# Altium PCB PCB1.PcbDoc
Units mil, origin at the board's own origin, x right, y up, seen from the top; angles counter-clockwise.
Board outline 2108.55 x 1574.8 mil, 2 copper layers (Top Layer, Bottom Layer); 9 components, 9 nets, 28 pads, 0 vias.
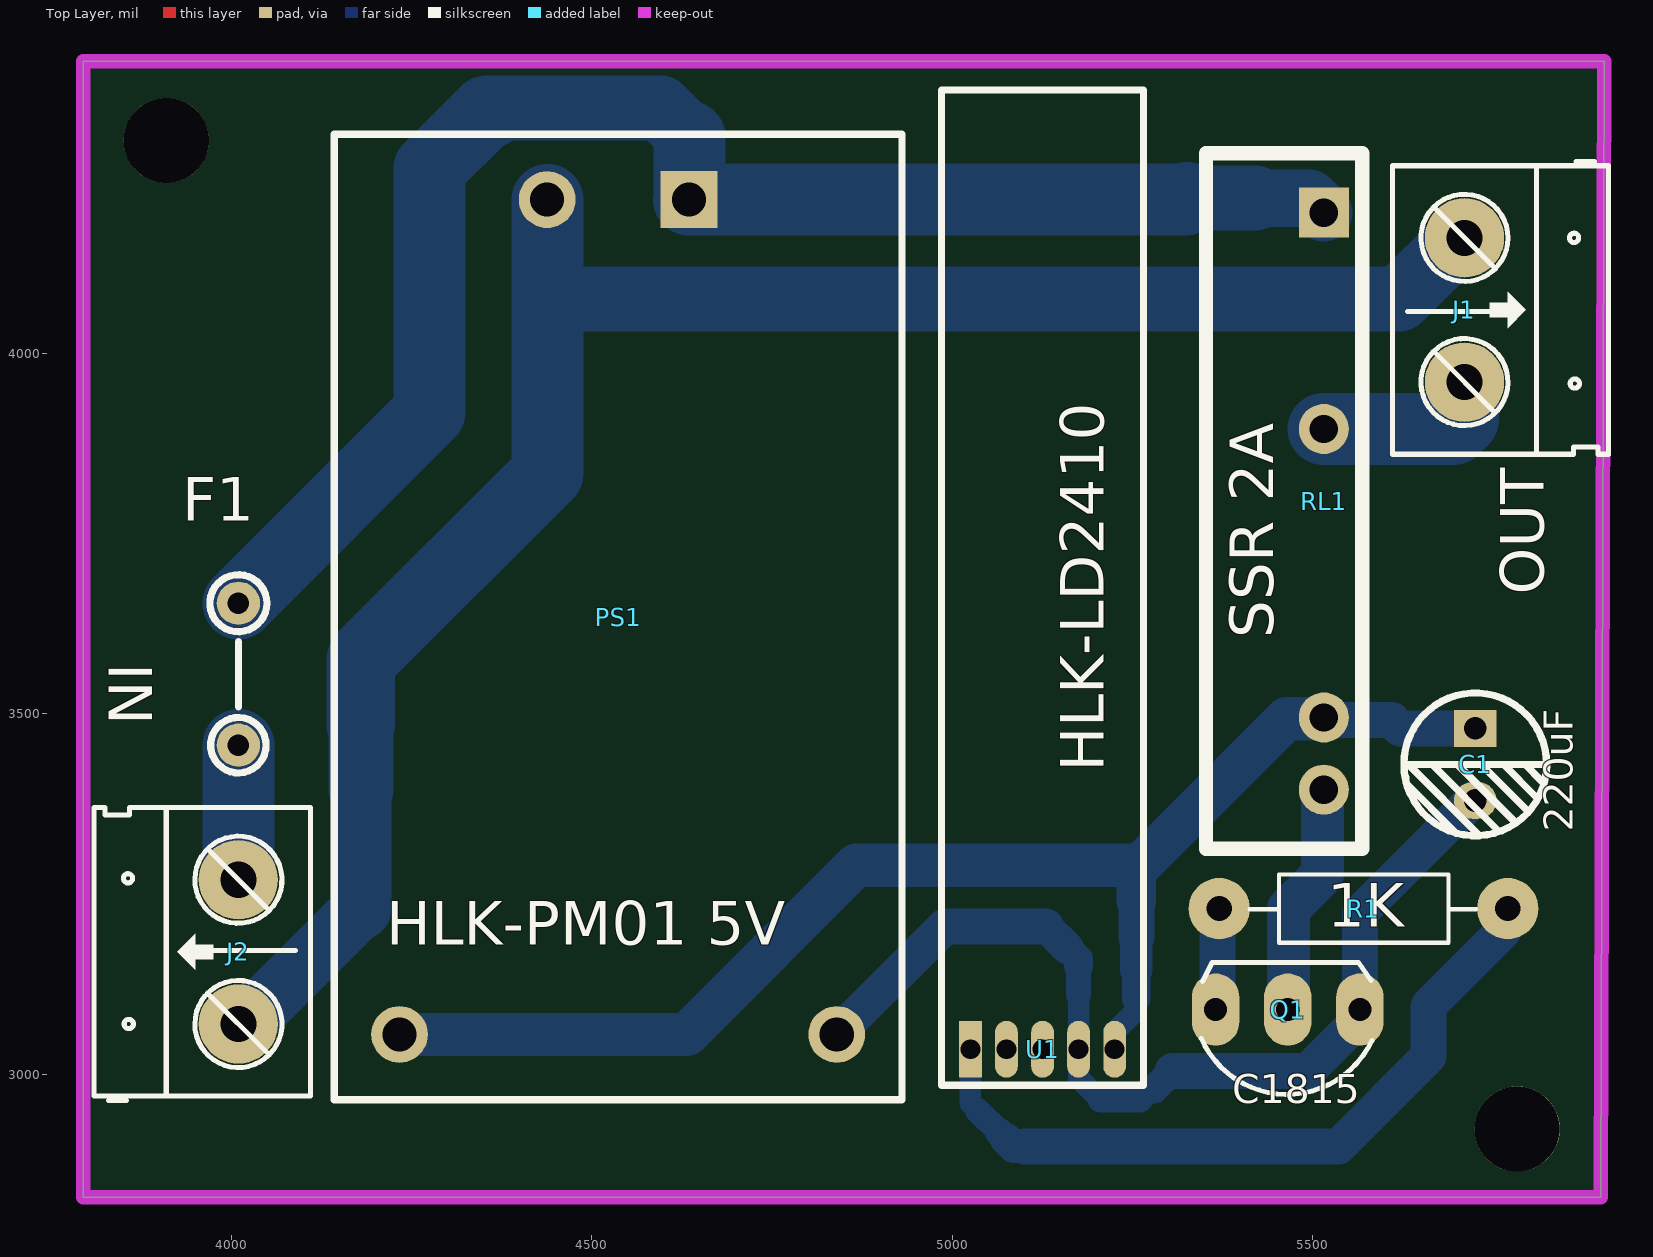
[diagram p0: Top Layer view]
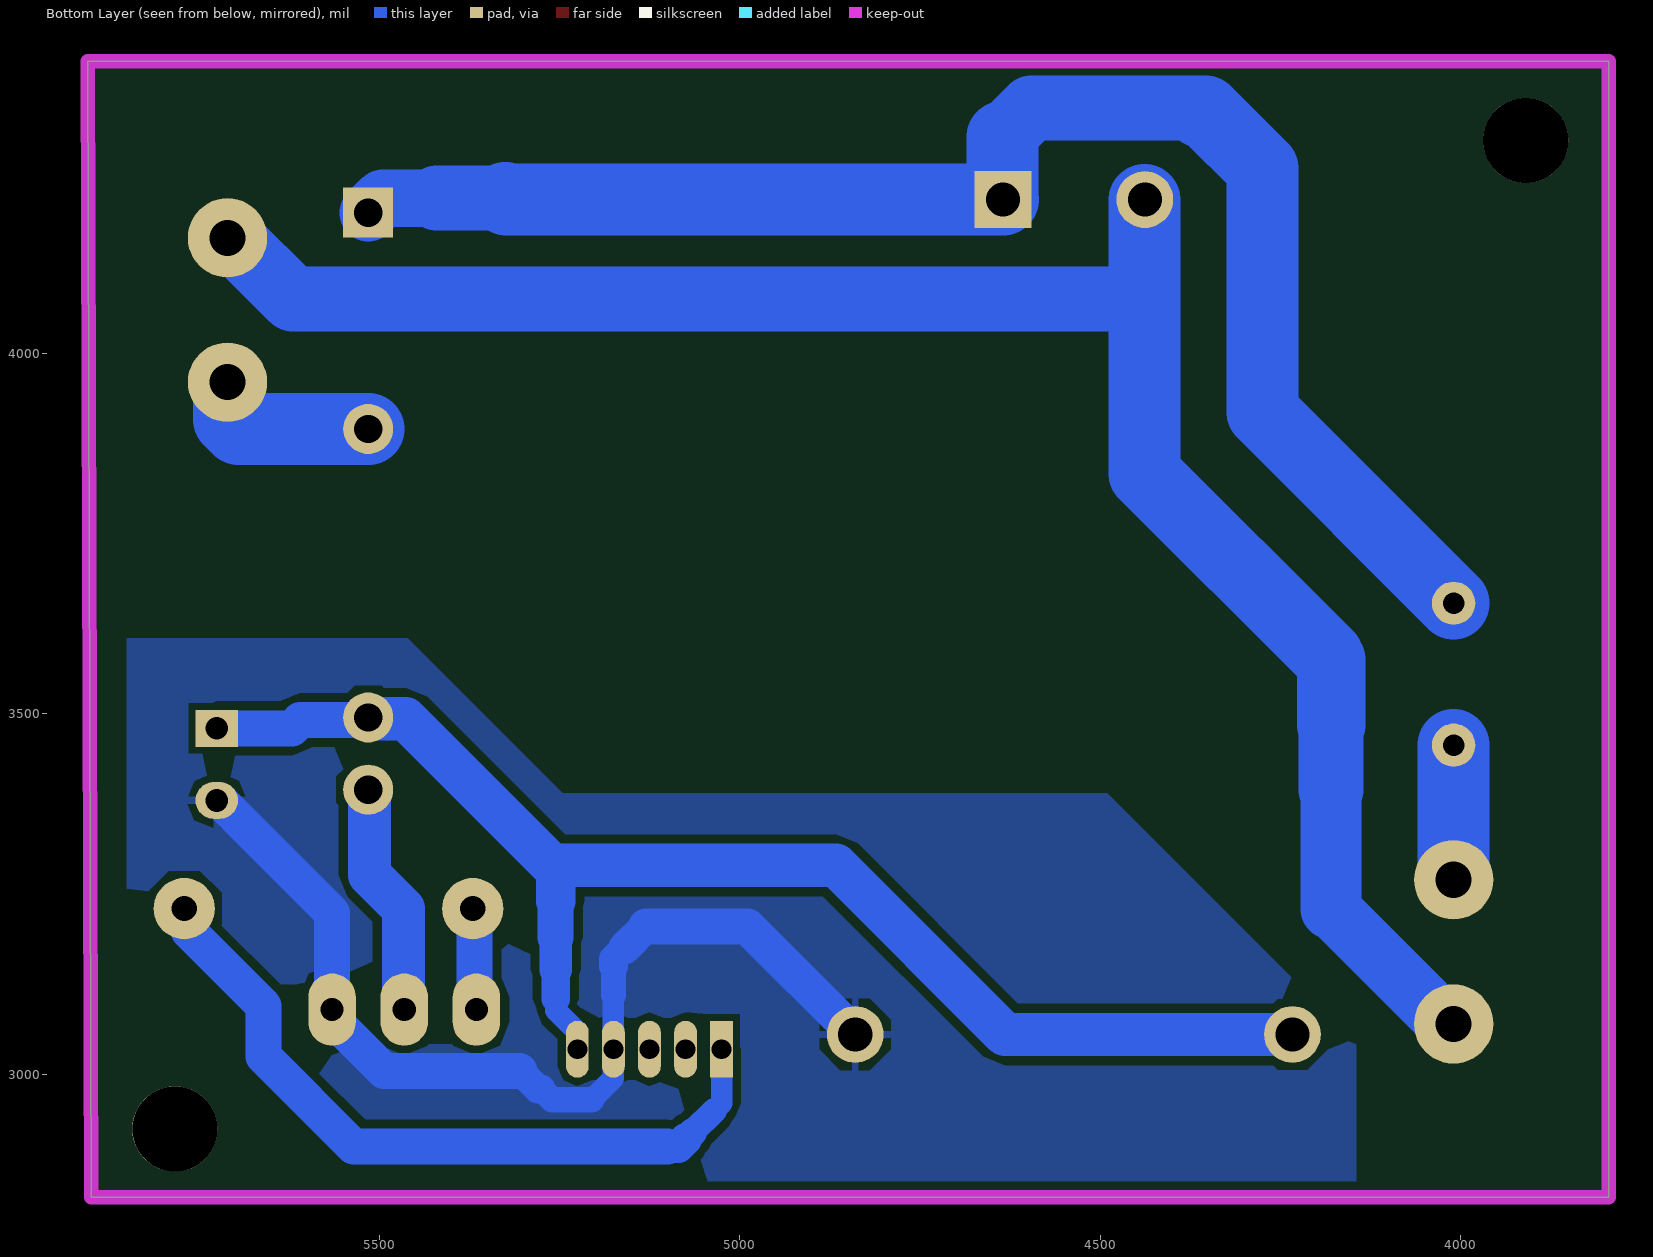
[diagram p1: Bottom Layer view, seen from below]
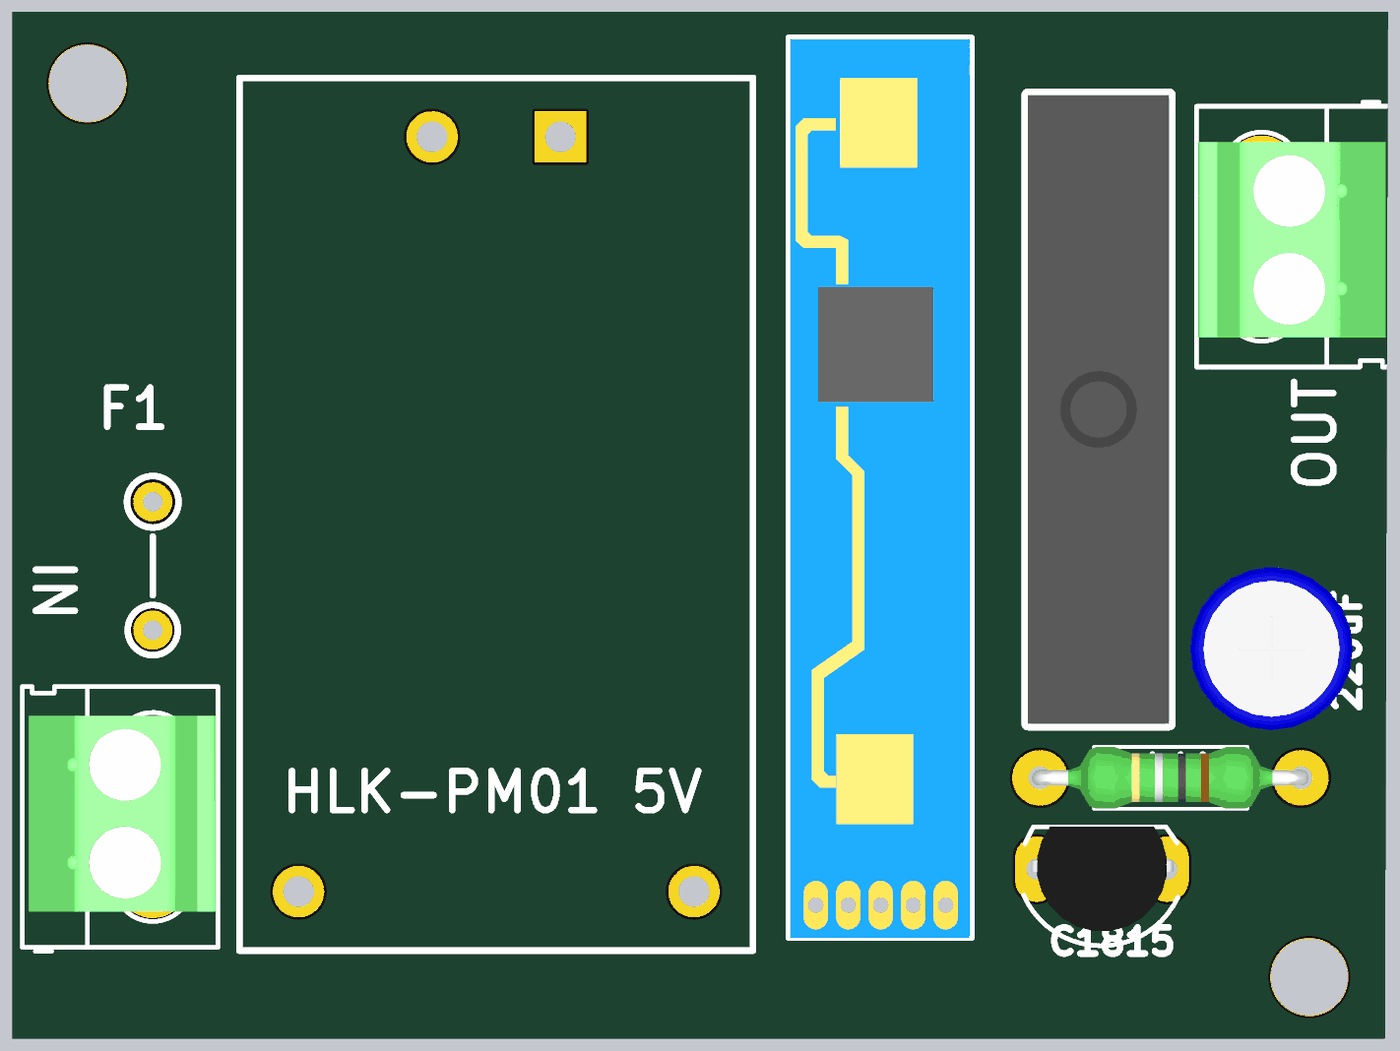
[diagram p2: 3D render of the assembled board from above, using the file's embedded part models]

## Layer stack, top to bottom
Top Solder: solder mask 0.4, Solder Resist, Dk 3.5
Top Layer: signal copper 1.4
Dielectric 1: dielectric 12.6, FR-4, Dk 4.8
Bottom Layer: signal copper 1.4
Bottom Solder: solder mask 0.4, Solder Resist, Dk 3.5

## Board outline
3795,2830 3795,4404.8 5903.55,4404.8 5898.95,2830

## Design rules (kind name [scope] priority, off if disabled: settings)
Clearance Clearance_1 [OnMid vs OnMid] p1: gap=10 ignorepadtopadclearanceinfootprint=FALSE sourcerule=40 cellrowname=All cellrowtype=0 cellcolname=All cellcoltype=0 innerlayers=TRUE
Clearance Clearance_2 [(ExistsOnLayer('Top Layer') Or ExistsOnLayer('Bottom Layer')) vs (ExistsOnLayer('Top Layer') Or ExistsOnLayer('Bottom Layer'))] p2: gap=10 ignorepadtopadclearanceinfootprint=FALSE sourcerule=40 cellrowname=All cellrowtype=0 cellcolname=All cellcoltype=0 outerlayers=TRUE
Clearance [All] p3: gap=10 ignorepadtopadclearanceinfootprint=FALSE ismatrix=TRUE
PolygonConnect [All] p1: connectstyle=Relief reliefconductorwidth=10 reliefentries=4 polygonreliefangle="90 Angle" airgapwidth=10
RoutingLayers [All] p1: top layer_v5=FALSE bottom layer_v5=TRUE
RoutingVias [All] p1: holewidth=28 width=50 viastyle="Through Hole" minholewidth=28 minwidth=50 maxholewidth=28 maxwidth=50
SolderMaskExpansion [All] p1: expansion=4 istentingtop=FALSE
Width MaxMinWidth_1 [InNet('NetJ1_2')] p1: maxlimit=100 minlimit=40 preferedwidth=80 minimp=50.000000 maximp=50.000000 favimp=50.000000
Width MaxMinWidth_2 [InNet('AC1')] p2: maxlimit=100 minlimit=40 preferedwidth=80 minimp=50.000000 maximp=50.000000 favimp=50.000000
Width MaxMinWidth_3 [InNet('AC2')] p3: maxlimit=100 minlimit=40 preferedwidth=80 minimp=50.000000 maximp=50.000000 favimp=50.000000
Width MaxMinWidth_5 [InNet('NetF1_1')] p4: maxlimit=100 minlimit=30 preferedwidth=80 minimp=50.000000 maximp=50.000000 favimp=50.000000
Width [All] p5: maxlimit=60 minlimit=30 preferedwidth=50
29 further rules are at their usual default settings.

## Components (designator, comment, footprint, x,y, rotation, side; value= is the part's Value field where it differs from the comment)
C1 "220uF" "Tu hoa 5mm" 5725,3430 r270 top
F1 "10A" "Fuse vertical" 4010,3555 r90 top value=Fuse
J1 "CON 2 KF301" "Con 2 KF301 5.08" 5710,4160 r270 top
J2 "CON 2 KF301" "Con 2 KF301 5.08" 4010,3070 r90 top
PS1 "HLK-PM01 5V" CONV_HLK-PM01 4536.57,4213.03 r270 top
Q1 "C1815" TO92-123 5465,3090 r180 top
R1 "1K" RES-1/4W 5585,3225 r0 top
RL1 "SSR 2A" G3MB-202P 5515,3395 r90 top
U1 "HLK-LD2410" HLK-LD2410 4920,3055 r0 top

## Footprints (in the part's own frame and the unit in brackets; to place one, negate y for a bottom-side part, rotate by r counter-clockwise, add the part's x,y. Pads: shape width x height; smd on the part's side, far side on the other; paste and mask are expansions set on the pad)
"Con 2 KF301 5.08" [mil]
  round 110 hole 50: 1(0,0) 2(200,0)
  silkscreen extent -106,-100 300,200, body extent -45,-97 255,190, height 335
CONV_HLK-PM01 [mm]
  rect 2x2 hole 1.2: 1(0,2.5)
  round 2 hole 1.2: 2(0,-2.5) 3(29.4,7.7) 4(29.4,-7.7)
  silkscreen extent -2.3,-10 31.7,10, body extent -2.29,-10.1 31.71,10.1, height 15.3
"Fuse vertical" [mil] "d=5mm"
  round 60 hole 30: 1(-98.43,0) 2(98.43,0)
  silkscreen extent -137,-40 138,39, body extent -73,-85 183,88, height 650
G3MB-202P [mm]
  rect 1.762x1.762 hole 1: 1(20.32,0)
  round 1.762 hole 1: 2(12.7,0) 3(2.54,0) 4(0,0)
  silkscreen extent -2.09,-1.35 22.41,4.15, body extent -2.09,-1.35 22.41,4.15, height 20.5
HLK-LD2410 [mm]
  rect 0.8x2 hole 0.7: 1(2.667,-0.508)
  oval 0.8x2 hole 0.7: 2(3.937,-0.508) 3(5.207,-0.508) 4(6.477,-0.508) 5(7.747,-0.508)
  silkscreen extent 1.65,-1.78 8.76,33.27, body extent 1.71,-1.78 8.71,33.22, height 2.1
RES-1/4W [mil]
  round 85 hole 35: 1(-215,5) 2(185,5)
  silkscreen extent -173,-42 141,52, body extent -227,-42 197,52, height 95
TO92-123 [mil] "TO-92"
  oval 66x100 hole 32: 1(-100,0) 2(0,0) 3(100,0)
  silkscreen extent -117,-65 120,118, body extent -109,-66 109,95, height 245
"Tu hoa 5mm" [mm]
  rect 1.3x1.5 hole 0.8: 1(-1.27,0)
  oval 1.3x1.5 hole 0.8: 2(1.27,0)
  silkscreen extent -2.51,-2.51 2.51,2.51, body extent -3.12,-3.18 3.23,3.18, height 14.55

## Part data
C1: library part "Tu Hoa 220uF 16V 6x11", "Cắm", Chung_Loai=Cắm, Don_Vi=Con, Ma_Hang=MH001348, So_Chan=2, Ten_Linh_Kien="Tụ Hóa 220uF 16V 6x11MM"
F1: library part Fuse, "Fuse", Designed by=VanDungEvn
J1 J2: "Cắm", Chung_Loai=Cắm, Don_Vi=Con, Ma_Hang=MH000987, Ten_Linh_Kien="CON 2 KF301-2P 5.08MM Xanh Dương"
PS1: library part "CONV HLK-PM01", "220VAC to 5V 3W", Package="Non-Standard Hi-link", Availability="Not in stock", Check_prices=https://www.snapeda.com/parts/HLK-20M12/Hi-link/view-part/?ref=eda, MF=Hi-link, MP=HLK-20M12, Price=None, SnapEDA_Link=https://www.snapeda.com/parts/HLK-20M12/Hi-link/view-part/?ref=snap
Q1: library part 2SC1815, "NPN 600mW, ECB"
R1: library part Res
RL1: library part "SSR G3MB-202P", "SSR 5V 2A", ComponentLink1Description=Datasheet, ComponentLink1URL=https://www.omron-russia.com/doc/relay/ssr/g3mb.pdf
U1: "HLK-LD2410B-P Cam bien hien dien"

## Free pads (board coordinates)
  round 118.11 hole 118.11: ""(3910,4295) ""(5783.05,2924.44)

## Nets (pads, with @x,y where several pads share a name; then routed paths per layer and width w, separated by ;. In a path a pad name is that pad's centre, name@x,y a point inside that pad or via, vN(x,y) a via of type N, cw(c..) or ccw(c..) an arc to the next point about the centre after c; other vN are vias at no path point)
+5: C1.1 PS1.4 RL1.3 U1.5 | length 1949.3
  Bottom Layer w30: U1.5 5225,3059.03 5255,3089.03 5255,3105
  Bottom Layer w40: 5255,3105 5255,3145
  Bottom Layer w45: 5255,3145 5255,3190
  Bottom Layer w50: 5255,3190 5255,3240 ; RL1.3 5518.71,3491.29 5609.18,3491.29 5620.47,3480 C1.1
  Bottom Layer w55: 5255,3240 5255,3285 5260,3290
  Bottom Layer w60: PS1.4 4632.02,3055.55 4866.47,3290 5260,3290 5463.21,3493.21 5513.21,3493.21 RL1.3
AC1: F1.2 PS1.1 RL1.1 | length 2097.6
  Bottom Layer w80: 5420,4215 5495,4215 RL1.1
  Bottom Layer w90: 4360,4339.8 4595.2,4339.8 4635.28,4299.72 ; 5325,4215 5420,4215
  Bottom Layer w100: F1.2 4275,3918.43 4275,4255.94 4353.86,4334.8 4360,4334.8 ; PS1.1 PS1.1@4635.28,4213.03 ; 4635.28,4299.72 PS1.1@4635.28,4213.03 ; 5325,4215 5323.03,4213.03 PS1.1@4635.28,4213.03
AC2: J1.1 J2.1 PS1.2 | length 2643.6
  Bottom Layer w80: J2.1 4018.12,3070 4033.12,3085 4035,3085 4180,3230
  Bottom Layer w85: 4180,3230 4180,3395
  Bottom Layer w90: 4180,3395 4180,3485 ; PS1.2 PS1.2@4438.43,4212.76 ; 4438.43,4100 4463.43,4075 5619.59,4075 5704.59,4160 J1.1
  Bottom Layer w95: 4180,3485 4180,3575 4185,3580
  Bottom Layer w100: 4185,3580 4438.43,3833.43 4438.43,4100 PS1.2@4438.43,4212.76
GND: C1.2 PS1.3 Q1.1 U1.4 | length 1401.3
  Bottom Layer w30: 5175,3110 U1.4 5175.29,3034.71 5175.29,2994.71 5205,2965
  Bottom Layer w35: 5175,3110 5175,3150 ; 5205,2965 5260,2965 5275,2980
  Bottom Layer w40: 5160,3175 5175,3160 5175,3150 ; 5275,2980 5280,2980 5305,3005
  Bottom Layer w45: 5130,3205 5160,3175
  Bottom Layer w50: PS1.3 4989.17,3205 5130,3205 ; 5305,3005 5493.17,3005 5565,3076.83 5565,3223.94 5721.06,3380 C1.2
IN: R1.2 U1.1 | length 1037.2
  Bottom Layer w30: U1.1 5025,2960 5035,2950
  Bottom Layer w35: 5035,2950 5065,2920
  Bottom Layer w40: 5065,2920 5075,2910
  Bottom Layer w45: 5075,2910 5085,2900 5100,2900
  Bottom Layer w50: 5100,2900 5535,2900 5660,3025 5660,3095 5763.3,3198.3 5763.3,3223.3 R1.2
NetF1_1: F1.1 J2.2 | length 186.6
  Bottom Layer w100: J2.2 F1.1
NetJ1_2: J1.2 RL1.2 | length 250.9
  Bottom Layer w100: RL1.2 5694.51,3895 5708.09,3908.58 5708.09,3958.09 J1.2
NetQ1_2: Q1.2 RL1.4 | length 325.7
  Bottom Layer w60: Q1.2 5466.15,3091.15 5466.15,3229.77 5513.21,3276.83 5513.21,3393.21 RL1.4
NetQ1_3: Q1.3 R1.1 | length 142.1
  Bottom Layer w50: Q1.3 5367.5,3092.5 5367.5,3227.5 R1.1
pads on no net: U1.2 U1.3

## Polygon pours and split planes (outlines as drawn)
GND on Bottom Layer "GND_L02_P000" (solid, remove dead copper, pour order 0): 4145,2835 4145,3065 4165,3065 4490,3390 5245,3390 5460,3605 5850,3605 5850,2835

## Keep-outs
Keep-Out Layer:
  the board outline again, w20

## Silkscreen, mask and mechanical layers (free items; w line width, h text height)
Top Overlay:
  text "OUT" at 5820,3665 h60 r90
  text "IN" at 3830,3570 h60 r270